# EAGLE board adapter (EAGLE 5.10)
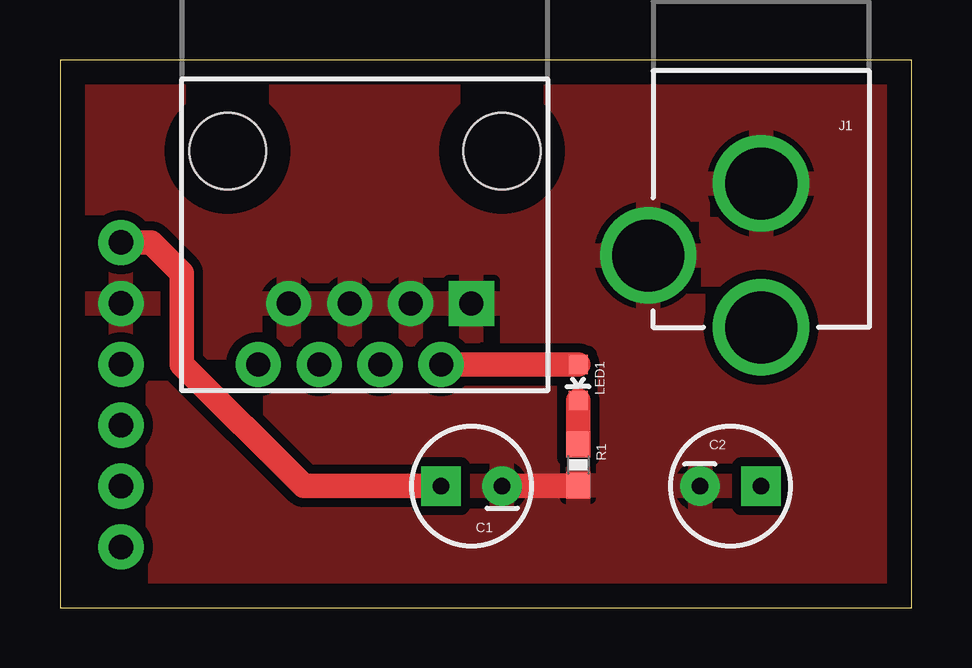
[diagram p0: board, top side]
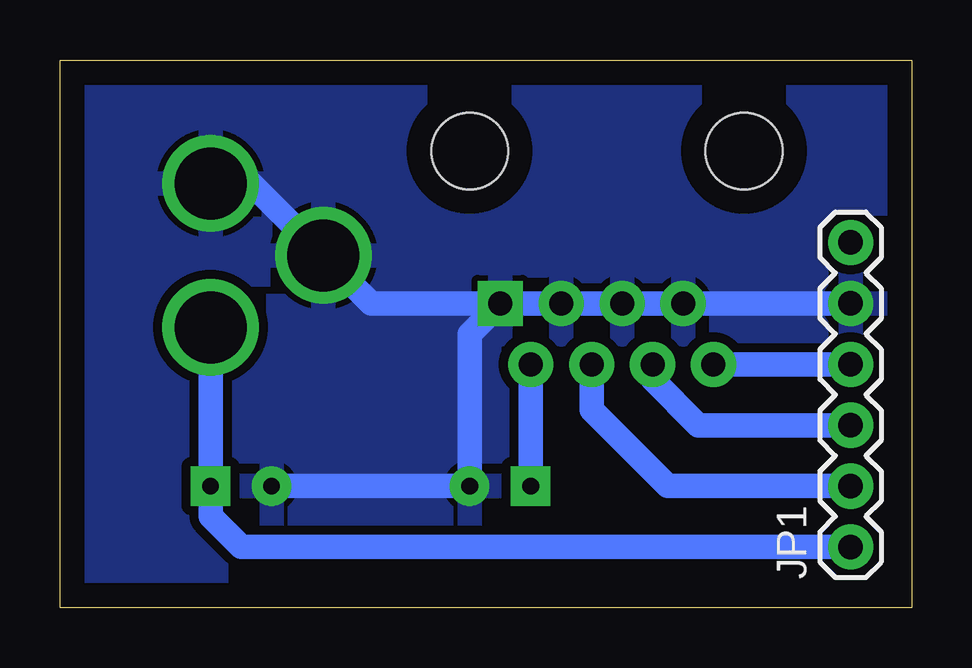
[diagram p1: board, bottom side, seen from below]

Size 35.48 x 22.85 mm. Coordinates in mm from the lower left corner, seen from the top.
Outline: 0,0 35.48,0 35.48,22.85 0,22.85 0,0
Copper layers (1*16): Top 0.035mm / dielectric 1.5mm / Bottom 0.035mm
Design rules "default": minimum track width 10mil, minimum drill 24mil, track to track 8mil, track to pad 8mil, pad to pad 8mil, via to via 8mil, smd to smd 8mil, copper to edge 40mil, drill to drill 8mil, minimum pad ring 10mil, minimum via ring 8mil, stop-mask expansion 4mil, vias tented up to drill 0mil, thermal gap 10mil

## Footprints (pad centres in the part's own frame; a part is rotated, then mirrored left to right if it is on the bottom)
CPOL-RADIAL-10UF-25V = drill 0.7 pad 1.651 square: 1 1.27,0 | drill 0.7 pad 1.651 round: 2 -1.27,0
POWER_JACK_PTH = drill 2.997 round: GND 0,7.7; GNDBREAK 4.7,10.7; PWR 0,13.7
1X06 = drill 1.016 pad 1.88 round: 1 0,0; 2 2.54,0; 3 5.08,0; 4 7.62,0; 5 10.16,0; 6 12.7,0
LED-0603 = smd 0.8 x 0.8: A 0,-0.75; C 0,0.75
0603-RES = smd 1.1 x 1: 1 -0.85,0; 2 0.85,0
RJ45-8 = drill 1 pad 1.88 square: 1 -4.445,6.35 | drill 1 pad 1.88 round: 2 -3.175,8.89; 3 -1.905,6.35; 4 -0.635,8.89; 5 0.635,6.35; 6 1.905,8.89; 7 3.175,6.35; 8 4.445,8.89 | hole 3.2: -5.715,0; 5.715,0

## Placement (x,y rotation side)
C1  [CPOL-RADIAL-10UF-25V]  17.14,5.08 180 top
C2  [CPOL-RADIAL-10UF-25V]  27.94,5.08 0 top
J1  POWER_JACKPTH  [POWER_JACK_PTH]  29.21,25.4 180 top
JP1  [1X06]  2.54,2.54 90 bottom
LED1  [LED-0603]  21.59,9.4 180 top
R1  5k  [0603-RES]  21.59,5.97 270 top
U$1  RJ45-8PTH  [RJ45-8]  12.7,19.05 180 top

## Library data of the parts
C1 C2 J1 JP1 LED1 R1 U$1 = SparkFun

## Nets
CLK: JP1.3 U$1.6
GND: C1.2 C2.2 J1.GND J1.GNDBREAK JP1.5 R1.2 U$1.1 U$1.3 U$1.5 U$1.7
LAT: JP1.2 U$1.4
N$1: JP1.4 U$1.8
N$2: LED1.C R1.1
VCC: C1.1 JP1.6 LED1.A U$1.2
VLED: C2.1 J1.PWR JP1.1

## Tracks (layer width: path | path; a pad name or v marks a point on that pad's centre or on a via)
CLK
  Bottom 1.016: U$1.6 10.79,9.53 8.89,7.62 JP1.3
GND
  Top 1.016: C1.2 21.55,5.08 R1.2
  Bottom 1.016: U$1.1 U$1.3 U$1.5 U$1.7 JP1.5 | U$1.1 22.51,12.7 J1.GNDBREAK 27.51,17.7 J1.GND | C2.2 C1.2 18.41,11.43 U$1.1
  pour Top (isolate 0.381): -1.27,24.13 -1.27,-1.27 36.83,-1.27 36.83,24.13
  pour Bottom (isolate 0.381): -1.27,24.13 -1.27,-1.27 36.83,-1.27 36.83,24.13
LAT
  Bottom 1.016: U$1.4 13.34,8.26 10.16,5.08 JP1.2
N$1
  Bottom 1.016: JP1.4 U$1.8
N$2
  Top 1.016: R1.1 LED1.C
VCC
  Top 1.016: JP1.6 3.81,15.24 5.08,13.97 5.08,10.16 10.16,5.08 C1.1 | LED1.A 15.89,10.15 U$1.2
  Bottom 1.016: C1.1 U$1.2
VLED
  Bottom 1.016: JP1.1 27.94,2.54 29.21,3.81 C2.1 J1.PWR